# Altium PCB SH-C30G-V1.5.PcbDoc
Units mil, origin at the board's own origin, x right, y up, seen from the top; angles counter-clockwise.
Board outline 2106.3 x 1417.32 mil, 2 copper layers (Top Layer, Bottom Layer), stack 62.206 mil thick; 38 components, 29 nets, 151 pads, 53 vias.
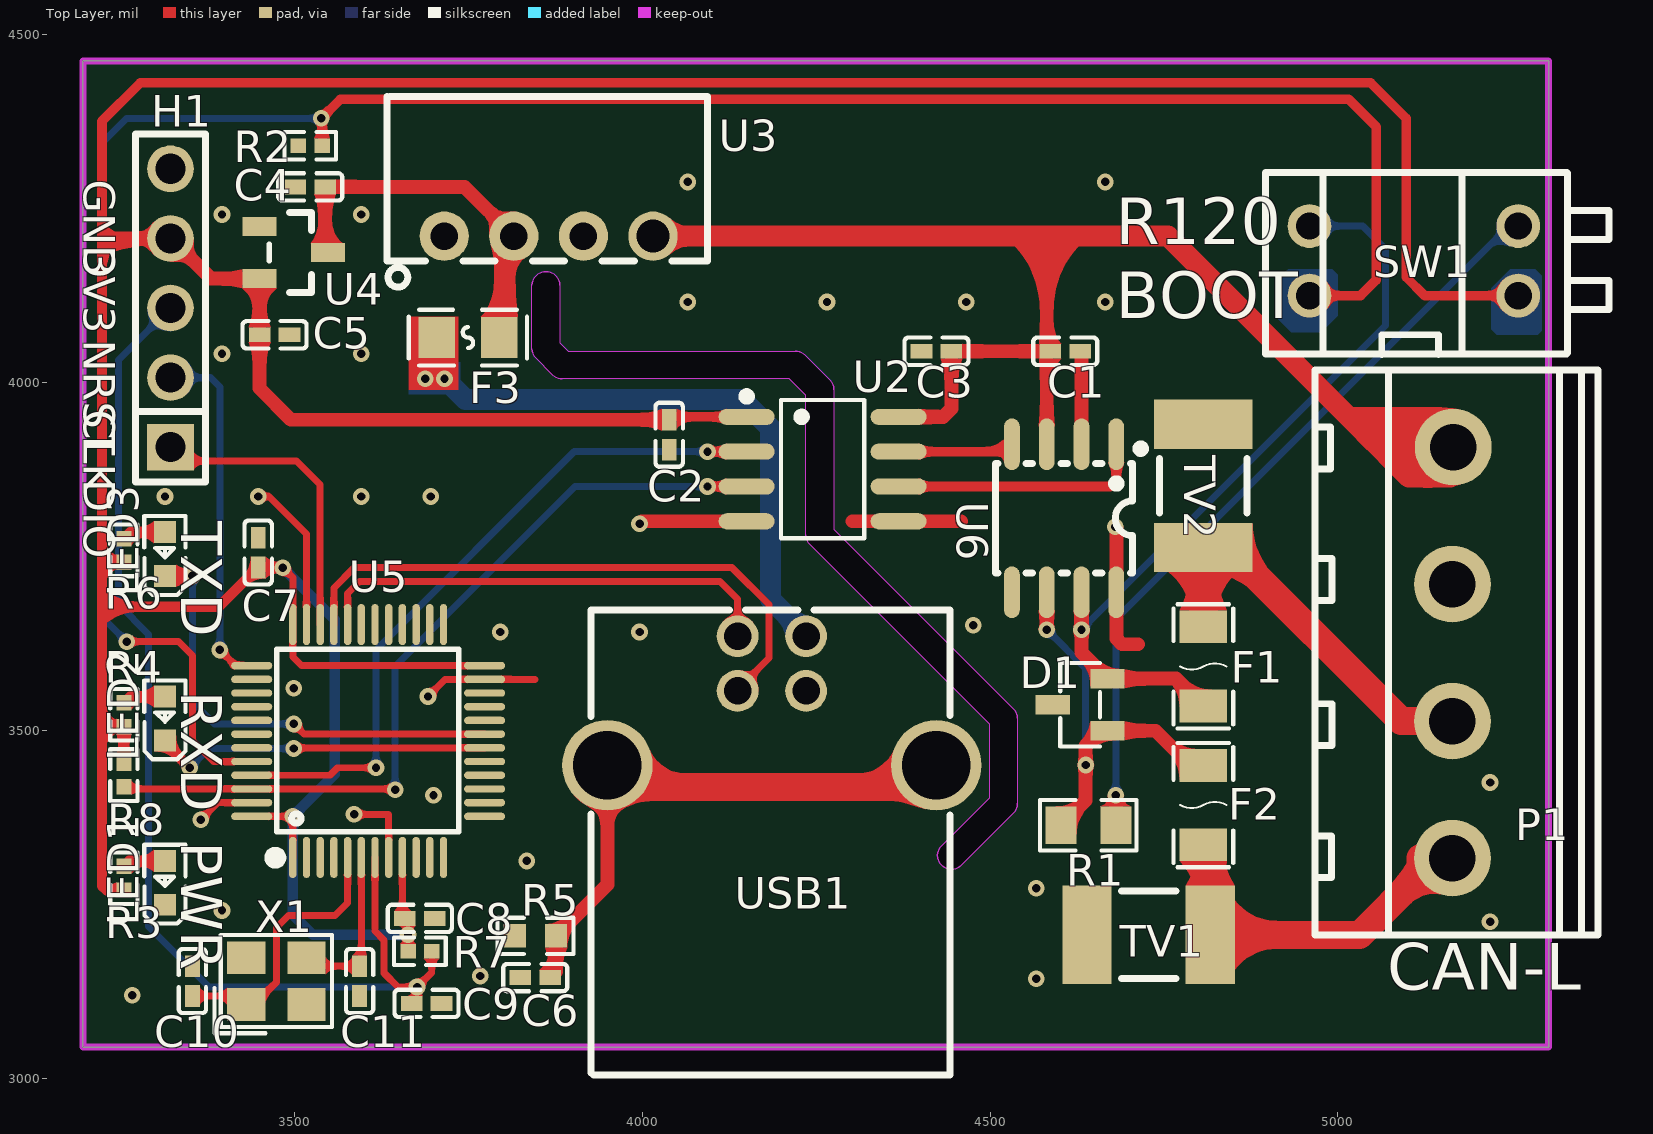
[diagram p0: Top Layer view]
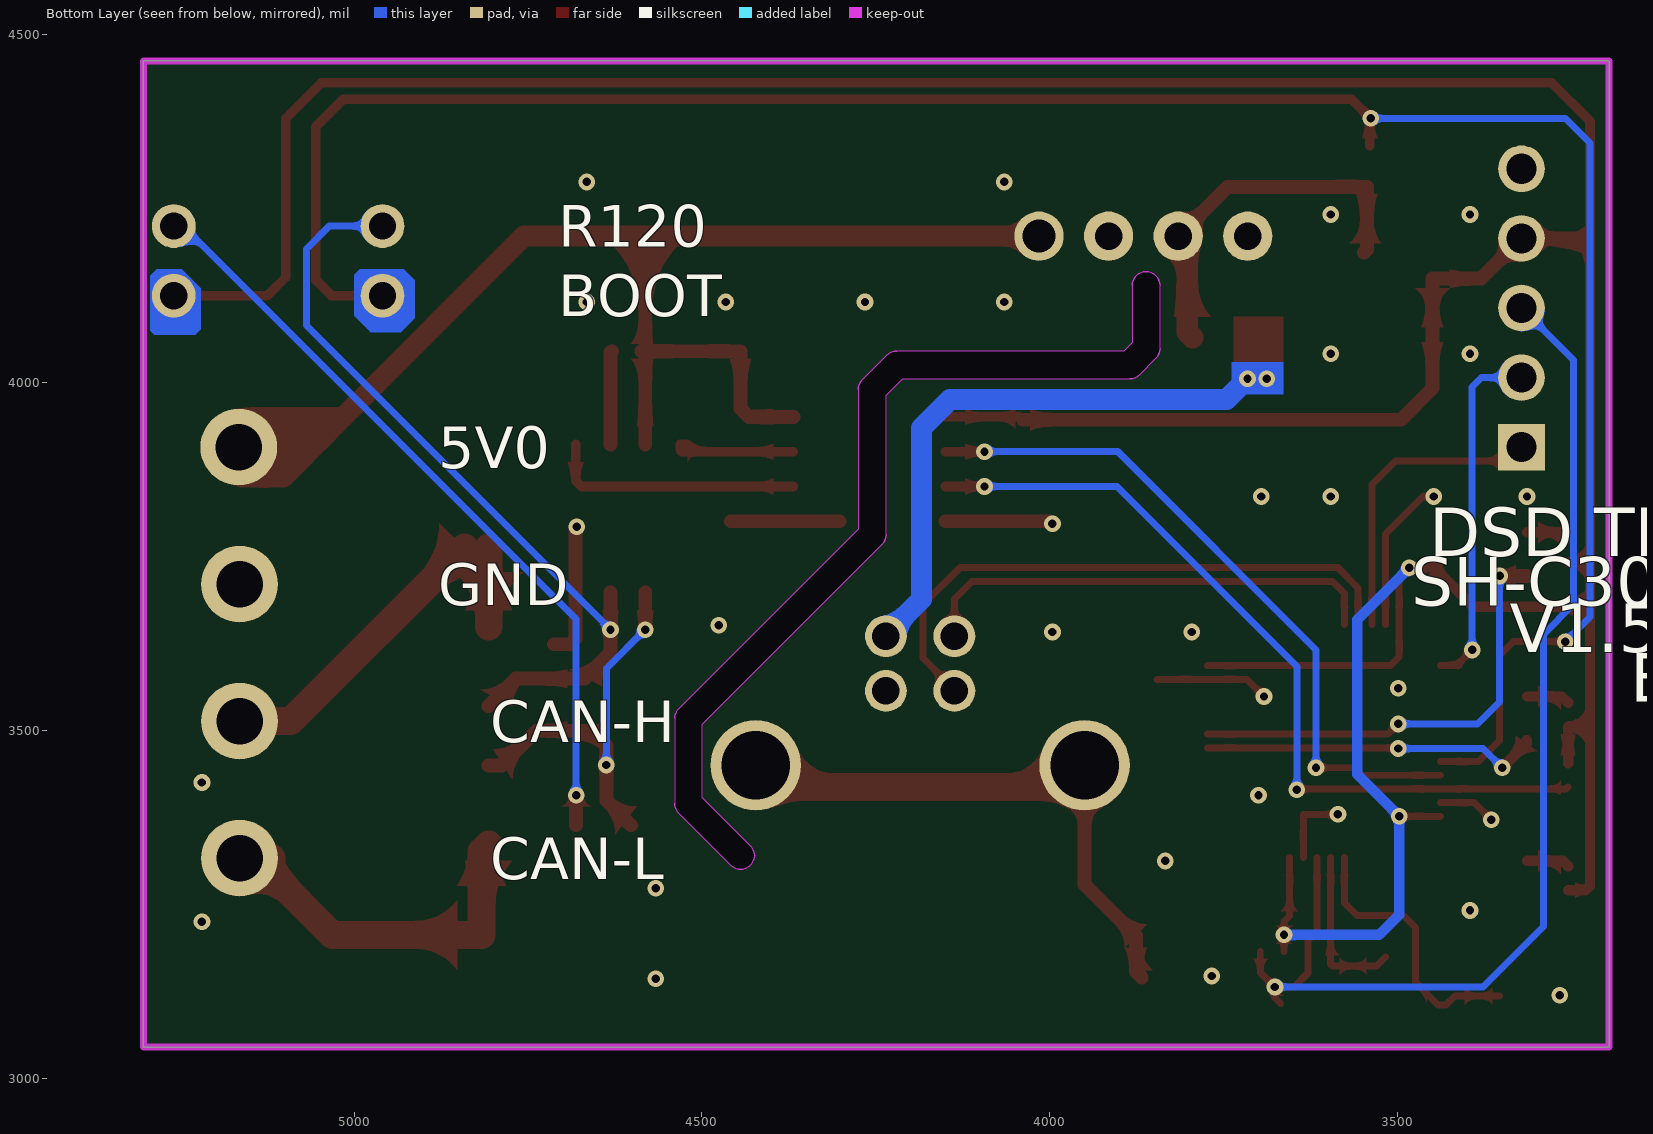
[diagram p1: Bottom Layer view, seen from below]

## Layer stack, top to bottom
Top Solder Mask Layer: solder mask 0.394, Dk 3.3
Top Layer: signal copper 1.379
Dielectric1: surface 59.449, FR4, Dk 4.5
Bottom Layer: signal copper 1.378
Bottom Solder Mask Layer: solder mask 0.394, Dk 3.3

## Board outline
3196.5,3044.65 3196.5,4461.97 5302.79,4461.97 5302.79,3044.65
cut-out: 4458.67,3306.1 4455.64,3303.61 4452.18,3301.76 4448.43,3300.62 4444.53,3300.24 4440.63,3300.62 4436.87,3301.76 4433.42,3303.61 4430.39,3306.1 4427.9,3309.13 4426.05,3312.58 4424.91,3316.34 4424.53,3320.24 4424.91,3324.14 4426.05,3327.89 4427.9,3331.35 4430.39,3334.38 4499.33,3403.33 4499.33,3508.8 4241.41,3766.73 4238.92,3769.76 4237.07,3773.21 4235.94,3776.97 4235.55,3780.87 4235.55,3981.25 4211.83,4004.96 3885.47,4004.96 3881.57,4005.35 3877.82,4006.49 3874.36,4008.33 3871.33,4010.82 3847.71,4034.44 3845.22,4037.47 3843.37,4040.93 3842.23,4044.68 3841.85,4048.58 3841.85,4139.14 3842.23,4143.04 3843.37,4146.79 3845.22,4150.25 3847.71,4153.28 3850.74,4155.77 3854.2,4157.61 3857.95,4158.75 3861.85,4159.14 3865.75,4158.75 3869.5,4157.61 3872.96,4155.77 3875.99,4153.28 3878.48,4150.25 3880.33,4146.79 3881.47,4143.04 3881.85,4139.14 3881.85,4056.87 3893.76,4044.96 4220.12,4044.96 4224.02,4044.58 4227.77,4043.44 4231.23,4041.59 4234.26,4039.1 4269.69,4003.67 4272.18,4000.64 4274.03,3997.18 4275.17,3993.43 4275.55,3989.53 4275.55,3789.15 4533.47,3531.23 4535.96,3528.2 4537.81,3524.74 4538.95,3520.99 4539.33,3517.09 4539.33,3395.04 4538.95,3391.14 4537.81,3387.39 4535.96,3383.93 4533.47,3380.9 4458.67,3306.1

## Design rules (kind name [scope] priority, off if disabled: settings)
BoardOutlineClearance Default [All] p0: genericclearance=10 ignorepadtopadclearanceinfootprint=FALSE except(0: Arc-SplitContinuation Track-SplitContinuation SMDPad-SplitContinuation THPad-SplitContinuation Via-SplitContinuation Fill-SplitContinuation Poly-SplitContinuation Region-SplitContinuation Text-SplitContinuation)
BoardOutlineClearance Plane_Default [All] p0: genericclearance=10 ignorepadtopadclearanceinfootprint=FALSE except(0: Arc-SplitContinuation Track-SplitContinuation SMDPad-SplitContinuation THPad-SplitContinuation Via-SplitContinuation Fill-SplitContinuation Poly-SplitContinuation Region-SplitContinuation Text-SplitContinuation)
BoardOutlineClearance Copper_gge5476 [All] p0: genericclearance=10 ignorepadtopadclearanceinfootprint=FALSE except(0: Arc-SplitContinuation Track-SplitContinuation SMDPad-SplitContinuation THPad-SplitContinuation Via-SplitContinuation Fill-SplitContinuation Poly-SplitContinuation Region-SplitContinuation Text-SplitContinuation)
BoardOutlineClearance Copper_gge6378 [All] p0: genericclearance=10 ignorepadtopadclearanceinfootprint=FALSE except(0: Arc-SplitContinuation Track-SplitContinuation SMDPad-SplitContinuation THPad-SplitContinuation Via-SplitContinuation Fill-SplitContinuation Poly-SplitContinuation Region-SplitContinuation Text-SplitContinuation)
BoardOutlineClearance Copper_gge5478 [All] p0: genericclearance=10 ignorepadtopadclearanceinfootprint=FALSE except(0: Arc-SplitContinuation Track-SplitContinuation SMDPad-SplitContinuation THPad-SplitContinuation Via-SplitContinuation Fill-SplitContinuation Poly-SplitContinuation Region-SplitContinuation Text-SplitContinuation)
BoardOutlineClearance Copper_gge6371 [All] p0: genericclearance=10 ignorepadtopadclearanceinfootprint=FALSE except(0: Arc-SplitContinuation Track-SplitContinuation SMDPad-SplitContinuation THPad-SplitContinuation Via-SplitContinuation Fill-SplitContinuation Poly-SplitContinuation Region-SplitContinuation Text-SplitContinuation)
BoardOutlineClearance otherClearance [All] p0: genericclearance=10 ignorepadtopadclearanceinfootprint=FALSE except(0: Arc-SplitContinuation Track-SplitContinuation SMDPad-SplitContinuation THPad-SplitContinuation Via-SplitContinuation Fill-SplitContinuation Poly-SplitContinuation Region-SplitContinuation Text-SplitContinuation)
Clearance Default [All] p1: gap=7 ignorepadtopadclearanceinfootprint=FALSE
Clearance Plane_Default [All] p1: gap=7 ignorepadtopadclearanceinfootprint=FALSE
Clearance Copper_gge5476 [All] p1: gap=7 ignorepadtopadclearanceinfootprint=FALSE
Clearance Copper_gge6378 [All] p1: gap=7 ignorepadtopadclearanceinfootprint=FALSE
Clearance Copper_gge5478 [All] p1: gap=7 ignorepadtopadclearanceinfootprint=FALSE
Clearance Copper_gge6371 [All] p1: gap=7 ignorepadtopadclearanceinfootprint=FALSE
Clearance otherClearance [All] p1: gap=7 ignorepadtopadclearanceinfootprint=FALSE
DiffPairsRouting differentialPair [All] p1: maxuncoupledlength=10 minlimit=5.9843 maxlimit=Infinity mostfreqgap=5.9843 toplayer_minwidth=5 toplayer_prefwidth=10 toplayer_maxwidth=100 bottomlayer_minwidth=5 bottomlayer_prefwidth=10 bottomlayer_maxwidth=100
PasteMaskExpansion pasteMaskExpansion [All] p1: expansion=0
PlaneConnect Default [All] p1: planeconnectstyle=Relief reliefexpansion=20 reliefentries=4 reliefconductorwidth=0 reliefairgap=10
PolygonConnect gge5476 [All] p1: connectstyle=Direct reliefentries=4 reliefconductorwidth=10 polygonreliefangle="90 Angle" airgapwidth=10
PolygonConnect gge6378 [All] p1: connectstyle=Direct reliefentries=4 reliefconductorwidth=10 polygonreliefangle="90 Angle" airgapwidth=10
PolygonConnect gge5478 [All] p1: connectstyle=Direct reliefentries=4 reliefconductorwidth=10 polygonreliefangle="90 Angle" airgapwidth=10
PolygonConnect gge6371 [All] p1: connectstyle=Direct reliefentries=4 reliefconductorwidth=10 polygonreliefangle="90 Angle" airgapwidth=10
RoutingVias Default [All] p1: viastyle="Through Hole" holewidth=12.0078 minholewidth=12.0078 maxholewidth=2362.0078 width=12.0078 minwidth=12.0078 maxwidth=2362.0078
SolderMaskExpansion solderMaskExpansion [IsVia] p1: useseparateexpansions=TRUE expansion=-1000 expansionbottom=-1000
SolderMaskExpansion solderMaskExpansion [All] p2: useseparateexpansions=TRUE expansion=4.0157 expansionbottom=4.0157
Width Default [All] p1: maxlimit=1000 minlimit=8 preferedwidth=10

## Components (designator, comment, footprint, x,y, rotation, side; value= is the part's Value field where it differs from the comment)
C1 "" C0402 4608.11,4044.65 r180 top locked
C2 "" C0402 4039.02,3924.76 r90 top locked
C3 "" C0402 4423.07,4044.65 r0 top locked
C4 "" C0402 3523.27,4280.87 r0 top locked
C5 "" C0402 3472.09,4068.27 r180 top locked
C6 "" C0402 3846.5,3144.65 r0 top locked
C7 "" C0402 3448.46,3755.47 r270 top locked
C8 "" C0402 3680.75,3229.69 r180 top locked
C9 "" C0402 3690.5,3107.64 r180 top locked
C10 "" C0402 3353.98,3139.73 r90 top locked
C11 "" C0402 3594.13,3139.73 r90 top locked
D1 "" SOT-23-3_L2.9-W1.3-P1.90-LS2.4-BR 4629.57,3536.77 r0 top locked
F1 "SMD1206B020TF/24" F1206_1 4806.5,3591.89 r90 top locked
F2 "SMD1206B020TF/24" F1206_1 4806.5,3392.6 r270 top locked
F3 "SMD0805B050TF" F0805_2 3749.9,4064.35 r0 top locked
H1 "" HDR-TH_5P-P2.54-V-M 3322.48,4106.85 r90 top locked
LED1 "" LED0603-RD_RED_1 3314.61,3280.87 r90 top locked
LED2 "" LED0603-RD 3314.61,3517.09 r90 top locked
LED3 "" LED0603-RD 3314.61,3753.31 r90 top locked
P1 "WJ128V-5.0-4P" CONN-TH_4P-P5.00_WJ128V-4P-5.0-14-00A 5165,3611.58 r90 top locked
R1 "" R0805 4641.38,3363.55 r0 top locked
R2 "" R0402 3523.27,4339.92 r0 top locked
R3 "" R0402 3255.55,3287.45 r90 top locked
R4 "" R0402 3255.55,3522.32 r90 top locked
R5 "" R0603 3846.84,3204.65 r0 top locked
R6 "" R0402 3255.55,3758.54 r90 top locked
R7 "" R0402 3680.8,3182.44 r180 top locked
R8 "NC" R0402 3255.55,3435.7 r270 top locked
SW1 "DP-02RP" SW-TH_DP-02XP 5109.05,4174.57 r90 top locked
TV1 "" DIO-DT-SMD_L4.5-W3.2 4727.99,3206.06 r180 top locked
TV2 "" DIO-DT-SMD_L4.5-W3.2 4806.5,3851.34 r90 top locked
U2 "ADUM3201ARZ" SOIC-8_L4.9-W3.9-P1.27-LS6.0-BL 4259.49,3875.36 r270 top locked
U3 "B0505S-1WR3" PWRM-TH_B0503S-1WR2 3865.79,4210 r0 top locked
U4 "ME6209A33M3G" SOT-23(SOT-23-3) 3499.65,4186.38 r270 top locked
U5 "" LQFP-48_L7.0-W7.0-P0.50-LS9.0-BL 3606.5,3484.65 r0 top locked
U6 "SIT1040T" SO-8_L4.9-W3.9-P1.27-LS5.9-BL 4606.5,3804.65 r180 top locked
USB1 "" USB-B-TH_USB-B01 4186.5,3542.6 r180 top locked
X1 "-" CRYSTAL-SMD_4P-L3.2-W2.5-BL 3474.6,3139.75 r0 top locked

## Footprints (in the part's own frame and the unit in brackets; to place one, negate y for a bottom-side part, rotate by r counter-clockwise, add the part's x,y. Pads: shape width x height; smd on the part's side, far side on the other; paste and mask are expansions set on the pad)
C0402 [mm]
  rect 0.79x0.54 smd paste-100 mask+0.051: 1(-0.545,0) 2(0.545,0)
  silkscreen extent -1.17,-0.5 1.17,0.5
CONN-TH_4P-P5.00_WJ128V-4P-5.0-14-00A [mm]
  round 2.8 hole 1.7 paste+0 mask+0.051: 1(-7.5,0.015) 2(-2.5,0.015) 3(2.5,0.015) 4(7.5,-0.015)
  silkscreen extent -10.31,-5.29 10.31,5.02
CRYSTAL-SMD_4P-L3.2-W2.5-BL [mm]
  rect 1.4x1.2 smd paste+0 mask+0.051: 1(-1.1,-0.85) 2(1.1,-0.85) 3(1.1,0.85) 4(-1.1,0.85)
  silkscreen extent -2.26,-1.91 2.03,1.68
DIO-DT-SMD_L4.5-W3.2 [mm]
  rect 1.8x3.6 smd paste+0 mask+0.051: 1(-2.25,0) 2(2.25,0)
  silkscreen extent -1,-1.6 1,1.6
F0805_2 [mm]
  rect 1.335x1.5 smd paste-100 mask+0.051: 1(-1.142,0) 2(1.142,0)
  silkscreen extent -2.16,-1.02 2.16,1.02
F1206_1 [mm]
  rect 1.19x1.728 smd paste+0 mask+0.051: 1(-1.445,0) 2(1.445,0)
  silkscreen extent -2.27,-1.09 2.27,1.09
HDR-TH_5P-P2.54-V-M [mm]
  rect 1.7x1.7 hole 1.1 paste+0 mask+0.051: 1(-5.08,0)
  round 1.7 hole 1.1 paste+0 mask+0.051: 2(-2.54,0) 3(0,0) 4(2.54,0) 5(5.08,0)
  silkscreen extent -6.35,-1.27 6.35,1.27
LED0603-RD [mm]
  rect 0.8x0.8 smd paste+0 mask+0.051: 1(-0.799,-0.003) 2(0.799,0.003)
  silkscreen extent -1.49,-0.75 1.39,0.76
LED0603-RD_RED_1 [mm]
  rect 0.8x0.8 smd paste+0 mask+0.051: 1(-0.8,-0.003) 2(0.8,0.003)
  silkscreen extent -1.49,-0.75 1.39,0.76
LQFP-48_L7.0-W7.0-P0.50-LS9.0-BL [mm]
  oval 0.27x1.5 smd paste+0 mask+0.05: 1(-2.75,-4.25) 2(-2.25,-4.25) 3(-1.75,-4.25) 4(-1.25,-4.25) 5(-0.75,-4.25) 6(-0.25,-4.25) 7(0.25,-4.25) 8(0.75,-4.25) 9(1.25,-4.25) 10(1.75,-4.25) 11(2.25,-4.25) 12(2.75,-4.25) 25(2.75,4.25) 26(2.25,4.25) 27(1.75,4.25) 28(1.25,4.25) 29(0.75,4.25) 30(0.25,4.25) 31(-0.25,4.25) 32(-0.75,4.25) 33(-1.25,4.25) 34(-1.75,4.25) 35(-2.25,4.25) 36(-2.75,4.25)
  oval 1.5x0.27 smd paste+0 mask+0.05: 13(4.25,-2.75) 14(4.25,-2.25) 15(4.25,-1.75) 16(4.25,-1.25) 17(4.25,-0.75) 18(4.25,-0.25) 19(4.25,0.25) 20(4.25,0.75) 21(4.25,1.25) 22(4.25,1.75) 23(4.25,2.25) 24(4.25,2.75) 37(-4.25,2.75) 38(-4.25,2.25) 39(-4.25,1.75) 40(-4.25,1.25) 41(-4.25,0.75) 42(-4.25,0.25) 43(-4.25,-0.25) 44(-4.25,-0.75) 45(-4.25,-1.25) 46(-4.25,-1.75) 47(-4.25,-2.25) 48(-4.25,-2.75)
  silkscreen extent -3.59,-4.46 3.3,3.34
PWRM-TH_B0503S-1WR2 [mm]
  round 1.8 hole 1 paste+0 mask+0.051: 1(-3.81,0) 2(-1.27,0) 3(1.27,0)
  round 1.8 hole 1.2 paste+0 mask+0.051: 4(3.81,0)
  silkscreen extent -5.9,-1.86 5.8,5.1
R0402 [mm]
  rect 0.566x0.54 smd paste-100 mask+0.051: 1(-0.433,0) 2(0.433,0)
  silkscreen extent -0.94,-0.5 0.94,0.5
R0603 [mil]
  rect 31.75x34.02 smd paste-3937.01 mask+2: 1(-29.66,0) 2(29.66,0)
  silkscreen extent -55,-26 55,26
R0805 [mm]
  rect 1.133x1.377 smd paste-100 mask+0.051: 1(-1,0) 2(1,0)
  silkscreen extent -1.76,-0.92 1.76,0.92
SO-8_L4.9-W3.9-P1.27-LS5.9-BL [mil]
  oval 22.6x74.33 smd paste+0 mask+2: 1(-75,-106.26) 2(-25,-106.26) 3(25,-106.26) 4(75,-106.26) 5(75,106.26) 6(25,106.26) 7(-25,106.26) 8(-75,106.26)
  silkscreen extent -116,-106 98,79
SOIC-8_L4.9-W3.9-P1.27-LS6.0-BL [mm]
  oval 0.588x2.045 smd paste+0 mask+0.051: 1(-1.905,-2.772) 2(-0.635,-2.772) 3(0.635,-2.772) 4(1.905,-2.772) 5(1.905,2.772) 6(0.635,2.772) 7(-0.635,2.772) 8(-1.905,2.772)
  silkscreen extent -2.8,-2.92 2.53,1.52
SOT-23(SOT-23-3) [mm]
  rect 0.7x1.25 smd paste+0 mask+0.102: 1(-0.95,-1.25) 2(0.95,-1.25) 3(0,1.25)
  silkscreen extent -1.46,-0.9 1.46,0.65
SOT-23-3_L2.9-W1.3-P1.90-LS2.4-BR [mm]
  rect 1.25x0.7 smd paste+0 mask+0.051: 1(1,-0.95) 2(1,0.95) 3(-1,0)
  silkscreen extent -0.73,-1.53 0.73,1.53
SW-TH_DP-02XP [mm]
  round 1.6 hole 1 paste+0 mask+0.051: 1(-1.27,-3.81) 2(1.27,-3.81) 3(1.27,3.81) 4(-1.27,3.81)
  silkscreen extent -3.42,-7.13 3.22,5.42
USB-B-TH_USB-B01 [mil]
  round 60 hole 39.4 paste+0 mask+2: 1(-49.2,-92.7) 2(49.2,-92.7) 3(49.2,-14) 4(-49.2,-14)
  round 129.9 hole 98.4 paste+0 mask+2: 5(-236.2,92.7) 6(236.2,92.7)
  silkscreen extent -256,-130 260,538

## Via types
v1: diameter 24, hole 12, Top Layer to Bottom Layer, 53 vias

## Nets (pads, with @x,y where several pads share a name; then routed paths per layer and width w, separated by ;. In a path a pad name is that pad's centre, name@x,y a point inside that pad or via, vN(x,y) a via of type N, cw(c..) or ccw(c..) an arc to the next point about the centre after c; other vN are vias at no path point)
$3N14841: F3.1 USB1.1 | length 843.6
  Bottom Layer w30: v1(3688.62,4005.28) v1(3716.18,4005.28) 3746.18,3975.28 4143.82,3975.28 4184.69,3934.41 4184.69,3688.36 USB1.1@4235.7,3637.35
$3N14842: LED1.2 R3.2 | length 62.2
  Top Layer w15: R3.2 3263.41,3312.34 LED1.2
$3N14843: LED2.2 R4.2 | length 62.7
  Top Layer w15: R4.2 3264.76,3548.56 LED2.2
$3N14844: LED3.2 R6.2 | length 62.7
  Top Layer w15: R6.2 3264.76,3784.78 LED3.2
$3N18645: C6.2 R5.2 USB1.5 USB1.6 | length 882.7
  Top Layer w19.68: C6.2 3876.5,3153.19 R5.2 3950.3,3278.45 USB1.6@3950.3,3442.03
  Top Layer w40: USB1.6@3950.3,3489.27 3950.3,3442.03 3973.66,3418.66 4403.27,3418.66 4422.7,3438.09 USB1.5@4422.7,3451.95
$3N22964: C11.2 U5.6 X1.3 | length 238.8
  Top Layer w10: X1.3@3517.92,3174.18 3530.91,3161.19 C11.2 3596.66,3163.71 U5.6
$3N23449: C10.1 U5.5 X1.1 | length 400.7
  Top Layer w10: C10.1 3418.31,3118.27 3431.3,3105.28 3442.17,3105.28 3474.6,3137.72 3474.6,3216.46 3491.77,3233.62 3558.7,3233.62 3576.97,3251.89 U5.5
$3N29005: R1.2 SW1.2 | length 1108.6
  Top Layer w20: R1.2 v1(4680.75,3406.85)
  Bottom Layer w10: v1(4680.75,3406.85) 4680.75,3659.9 5245.42,4224.57 SW1.2
$3N54755: F2.2 P1.1 TV1.1 | length 494.8
  Top Layer w40: F2.2 4816.57,3325.63 TV1.1 5031.14,3206.06 5118.46,3293.39 P1.1@5118.46,3316.3
$3N54765: F1.2 P1.2 TV2.1 | length 494.5
  Top Layer w40: F1.2 TV2.1 ; TV2.1@4841.29,3762.76 5090.91,3513.15 P1.2@5118.46,3513.15
+3V3: C2.2 C5.2 C7.2 C8.2 H1.4 R3.1 R4.1 R6.1 R7.2 R8.1 SW1.1 U2.1 U4.2 U5.1 U5.9 U5.24 U5.36 U5.48 | length 6432.8
  Top Layer w10: 3224.05,4223.09 3225.49,4223.09 3241.73,4206.85 ; U5.48 v1(3498.23,3376.38) U5.1 ; v1(3483.9,3733.62) 3498.23,3719.3 U5.36 3498.23,3605.12 3510.43,3592.92 U5.24 ; U5.9 3655.71,3233.27 C8.2 3663.76,3225.22 v1(3663.76,3206.07) R7.2
  Top Layer w13.78: 3227.2,4206.85 3224.05,4210 3224.05,4223.09 3224.05,4375.36 3279.17,4430.47 5046.89,4430.47 5098.07,4379.29 5098.07,4150.95 5124.45,4124.57 SW1.1 ; C2.2 4043.15,3950.36 U2.1
  Top Layer w15: 3227.2,4206.85 3224.05,4206.85 3224.05,4189.17 ; 3241.73,4206.85 3224.05,4189.17 ; R3.1 3230.58,3270.41 3224.05,3276.93 3224.05,3505.49 ; R8.1 R4.1 3224.26,3505.28 3224.05,3505.49 ; R6.1 3224.93,3741.5 3224.05,3742.38 ; v1(3483.9,3733.62) 3483.51,3734.01 C7.2 3392,3677.55 3224.05,3677.55 ; 3224.05,3505.49 3224.05,3677.55 ; 3224.05,3677.55 3224.05,3742.38 ; 3224.05,3742.38 3224.05,4189.17
  Top Layer w20: 3227.2,4206.85 3241.73,4206.85 H1.4 3380.35,4148.98 U4.2 3450.44,3991.49 3495.71,3946.22 C2.2
  Bottom Layer w15: v1(3483.9,3733.62) 3558.7,3658.82 3558.7,3436.85 v1(3498.23,3376.38) 3498.23,3235.04 3527.2,3206.07 v1(3663.76,3206.07)
+5V: C4.2 F3.2 U3.2 U4.3 | length 550.9
  Top Layer w20: U4.3 3544.73,4190.5 C4.2 3744.92,4280.87 U3.2
  Top Layer w31.5: F3.2 3802.8,4072.21 3802.8,4197.01 U3.2
BOOT0: R2.2 SW1.4 U5.44 | length 3292.1
  Top Layer w10: v1(3259.49,3627.32) 3334.29,3627.32 3353.98,3607.64 3353.98,3485.59 3384.45,3455.12 U5.44
  Top Layer w13.78: R2.2 3540.31,4378 v1(3539.02,4379.29) 3566.4,4406.67 5015.57,4406.67 5054.76,4367.48 5054.76,4147.01 5032.32,4124.57 SW1.4
  Bottom Layer w10: v1(3259.49,3627.32) 3224.05,3662.76 3224.05,4343.86 3259.49,4379.29 v1(3539.02,4379.29)
CAN_RXD: U2.7 U6.4 | length 196.8
  Top Layer w13.78: U2.7 4510.87,3900.36 ; 4510.87,3900.36 4521.42,3910.91 U6.4 4531.5,3903.03 4528.82,3900.36 4510.87,3900.36
CAN_TXD: U2.6 U6.1 | length 368.4
  Top Layer w13.8: U2.6 4672.87,3850.36 4681.5,3858.98 U6.1
GND: C2.1 C4.1 C5.1 C6.1 C7.1 C8.1 C9.1 C10.2 C11.1 H1.5 LED1.1 R2.1 R5.1 U2.4 U3.1 U4.1 U5.8 U5.23 U5.35 U5.47 USB1.4 X1.2 X1.4 | length 736.5
  Top Layer w10: v1(3365.79,3371.42) 3390.44,3396.07 U5.47 ; v1(3448.46,3835.99) 3464.21,3835.99 3517.92,3782.28 U5.35 ; v1(3586.26,3379.29) 3636.03,3379.29 U5.8 ; v1(3692.56,3548.58) 3717.2,3573.23 U5.23 3846.1,3573.23
  Top Layer w20: v1(3996.5,3796.62) 4000.24,3800.36 U2.4
  other v1: 3267.36,3119.45 3767.36,3147.01 3396.5,3241.24 3834.29,3312.36 3700.43,3406.85 3499.65,3560.4 3796.5,3641.24 3996.5,3641.24 3314.61,3835.99 3596.5,3835.99 3696.5,3835.99 3396.5,4041.24 3596.5,4041.24 3396.5,4241.24 3596.5,4241.24
GND-CAN: C1.1 C3.1 D1.3 P1.3 TV1.2 TV2.2 U2.5 U3.3 U6.2 U6.8 | length 486.2
  Top Layer w20: 4302.5,3800.36 U2.5 4458.5,3800.36 ; C1.1 4631.5,4042.72 U6.2 ; v1(4679.91,3792.32) 4681.5,3790.74 U6.8 4681.5,3631.65 4689.5,3623.65 4712.5,3623.65
  other v1: 4566.58,3143.07 5218.54,3224.96 4566.58,3272.99 5218.54,3424.96 4476.02,3650.95 4065.8,4115.51 4265.8,4115.51 4465.8,4115.51 4665.8,4115.51 4065.79,4287.95 4665.79,4287.95
JL-SWCLK: H1.2 U5.37 | length 509.6
  Top Layer w10: v1(3393.35,3615.51) 3415.94,3592.92 U5.37
  Bottom Layer w10: H1.2 3379.96,4006.85 3393.35,3993.47 v1(3393.35,3615.51)
JL-SWDIO: H1.1 U5.34 | length 438.5
  Top Layer w10: H1.1 3342.17,3887.17 3503.58,3887.17 3537.6,3853.15 U5.34
LED1: LED2.1 U5.18 | length 489.6
  Top Layer w10: v1(3499.65,3473.78) 3500.67,3474.81 U5.18
  Top Layer w15: LED2.1 3314.74,3481.52 v1(3350.04,3446.22)
  Bottom Layer w10: v1(3350.04,3446.22) 3377.6,3473.78 v1(3499.65,3473.78)
LED2: LED3.1 U5.19 | length 659.3
  Top Layer w10: v1(3499.65,3509.21) 3514.37,3494.49 U5.19
  Top Layer w19.68: LED3.1 v1(3353.98,3721.83)
  Bottom Layer w10: v1(3353.98,3721.83) 3353.98,3540.71 3385.47,3509.21 v1(3499.65,3509.21)
NRST: C9.2 H1.3 R7.1 U5.7 | length 1673.6
  Top Layer w10: U5.7 3616.34,3211.42 3629.57,3198.19 3629.57,3150.95 3649.25,3131.26 v1(3676.81,3131.26) ; C9.2 3676.81,3115.41 v1(3676.81,3131.26) ; R7.1 3697.84,3152.29 v1(3676.81,3131.26)
  Bottom Layer w10: H1.3 3247.68,4032.05 3247.68,3681.26 3290.98,3637.95 3290.98,3217.88 3377.6,3131.26 v1(3676.81,3131.26)
RXD: U2.2 U5.45 | length 1002.9
  Top Layer w10: U5.45 3551.85,3435.44 3562.64,3446.22 v1(3617.76,3446.22)
  Top Layer w13.78: v1(4094.13,3900.36) U2.2
  Bottom Layer w10: v1(3617.76,3446.22) 3617.76,3615.51 3902.6,3900.36 v1(4094.13,3900.36)
TXD: R8.2 U2.3 U5.46 | length 1180.6
  Top Layer w10: R8.2 3258.47,3415.75 U5.46 3644.29,3415.75 v1(3645.31,3414.73)
  Top Layer w13.78: v1(4094.13,3850.36) U2.3
  Bottom Layer w10: v1(3645.31,3414.73) 3645.31,3591.89 3903.78,3850.36 v1(4094.13,3850.36)
UCAN_H: D1.2 F1.1 SW1.3 U6.7 | length 1144.6
  Top Layer w20: U6.7 v1(4631.5,3644.65) 4631.5,3611.62 D1.2 4767.32,3574.17 F1.1
  Bottom Layer w10: v1(4631.5,3644.65) 5068.5,4081.65 5068.5,4191.65 5035.57,4224.57 SW1.3
UCAN_L: D1.1 F2.1 R1.1 U6.6 | length 598.9
  Top Layer w20: v1(4581.5,3644.65) U6.6 ; R1.1 4637.44,3398.98 v1(4637.44,3450.16) 4637.44,3477.72 4659.1,3499.37 D1.1 4737.83,3499.37 4787.72,3449.49 F2.1
  Bottom Layer w10: v1(4581.5,3644.65) 4637.44,3588.7 v1(4637.44,3450.16)
USBDM: U5.32 USB1.2 | length 674
  Top Layer w10: U5.32 3576.97,3696.77 3594.13,3713.94 4111.89,3713.94 4137.3,3688.53 USB1.2@4137.3,3637.35
USBDP: U5.33 USB1.3 | length 852.4
  Top Layer w10: U5.33 3557.29,3704.65 3586.26,3733.62 4129.57,3733.62 4182.3,3680.9 4182.3,3603.65 USB1.3@4137.3,3558.65
VDD-CAN: C1.2 C3.2 P1.4 U2.8 U3.4 U6.3 | length 2555.5
  Top Layer w20: U2.8 4432.72,3950.36 4444.53,3962.17 C3.2 C1.2@4581.5,4044.65 ; 4578.51,4210 4581.5,4207.02 4581.5,4049.8 C1.2 C1.2@4581.5,4044.65 ; U6.3 C1.2@4581.5,4044.65
  Top Layer w30: U3.4 4578.51,4210 4755.55,4210 5016.16,3949.39 ; 5016.16,3949.39 P1.4@5146.08,3949.39 ; 5016.16,3949.39 5027.21,3938.35 ; 5027.21,3938.35 5088.15,3938.35 ; 5027.21,3938.35 5046.89,3918.66 ; 5046.89,3918.66 5058.7,3906.85 ; 5046.89,3918.66 5105.98,3918.66 5106.91,3919.59 ; 5058.7,3906.85 P1.4@5119.64,3906.85 ; 5058.7,3906.85 5078.39,3887.17 ; 5078.39,3887.17 5102.01,3863.55 5161.06,3863.55 5172.87,3875.36 5172.87,3922.6 P1.4@5146.08,3949.39 ; 5078.39,3887.17 5145.91,3887.17 P1.4 P1.4@5119.64,3906.85 ; 5088.15,3938.35 5106.91,3919.59 ; 5088.15,3938.35 P1.4@5146.08,3949.39 ; 5106.91,3919.59 P1.4@5119.64,3906.85
pads on no net: U5.2 U5.3 U5.4 U5.10 U5.11 U5.12 U5.13 U5.14 U5.15 U5.16 U5.17 U5.20 U5.21 U5.22 U5.25 U5.26 U5.27 U5.28 U5.29 U5.30 U5.31 U5.38 U5.39 U5.40 U5.41 U5.42 U5.43 U6.5

## Polygon pours and split planes (outlines as drawn)
GND-CAN on Top Layer (solid, remove dead copper, pour order 2): 3905.16,4355.67 3877.6,4328.11 3877.6,4036.77 3869.72,4028.9 4259.49,4028.9 4259.49,3796.62 4515.39,3540.71 4515.39,3430.47 4440.59,3355.67 4440.59,3060.4 4456.34,3044.65 5284.71,3044.65 5306.73,3066.67 5306.73,3958.03 5267.36,3997.4 4976.02,3997.4 4889.41,4084.02 4889.41,4304.49 4838.23,4355.67
GND-CAN on Bottom Layer (solid, remove dead copper, pour order 8): 3901.22,4355.67 3873.66,4328.11 3873.66,4036.77 3865.79,4028.9 4255.55,4028.9 4255.55,3796.62 4511.46,3540.71 4511.46,3430.47 4459.4,3378.42 4459.4,3044.65 5280.77,3044.65 5302.79,3066.67 5302.79,3961.97 5267.36,3997.4 4842.17,3997.4 4822.48,4017.09 4822.48,4335.99 4802.8,4355.67
GND-CAN on Top Layer (solid, remove dead copper, pour order 0): 3877.83,4273.77 3877.83,4051.89 3963.72,4051.89 3963.72,4273.77
GND on Bottom Layer (solid, remove dead copper, pour order 10): 3196.5,4461.97 3519.33,4461.97 3539.02,4461.97 3802.8,4461.97 3804.33,4221.46 3804.33,4113.72 3794.94,4104.33 3665.63,4104.33 3649.25,4087.95 3649.25,3950.36 4173.86,3950.36 4188.62,3935.59 4188.62,3800.3 4326.42,3662.51 4326.42,3481.66 4294.66,3449.9 3950.3,3449.9 3950.3,3041.24 3946.89,3044.65 3196.5,3044.65
GND on Top Layer (solid, remove dead copper, pour order 6): 3644.83,4273.77 3644.83,4108.89 3763.72,4108.89 3763.72,4273.77
GND on Top Layer (solid, remove dead copper, pour order 4): 3196.5,4461.97 3519.33,4461.97 3527.2,4454.1 3527.2,4298.39 3544.73,4280.87 3744.92,4280.87 3804.33,4221.46 3804.33,4113.72 3794.94,4104.33 3665.63,4104.33 3657.13,4095.83 3657.13,3946.3 3657.04,3946.22 4169.72,3946.22 4173.86,3950.36 4188.62,3935.59 4188.62,3800.3 4326.42,3662.51 4326.42,3481.66 4294.66,3449.9 3950.3,3449.9 3950.3,3041.24 3946.89,3044.65 3196.5,3044.65

## Keep-outs
Board Outline Layer:
  region: 4458.67,3306.1 4455.64,3303.61 4452.18,3301.76 4448.43,3300.62 4444.53,3300.24 4440.63,3300.62 4436.87,3301.76 4433.42,3303.61 4430.39,3306.1 4427.9,3309.13 4426.05,3312.58 4424.91,3316.34 4424.53,3320.24 4424.91,3324.14 4426.05,3327.89 4427.9,3331.35 4430.39,3334.38 4499.33,3403.33 4499.33,3508.8 4241.41,3766.73 4238.92,3769.76 4237.07,3773.21 4235.94,3776.97 4235.55,3780.87 4235.55,3981.25 4211.83,4004.96 3885.47,4004.96 3881.57,4005.35 3877.82,4006.49 3874.36,4008.33 3871.33,4010.82 3847.71,4034.44 3845.22,4037.47 3843.37,4040.93 3842.23,4044.68 3841.85,4048.58 3841.85,4139.14 3842.23,4143.04 3843.37,4146.79 3845.22,4150.25 3847.71,4153.28 3850.74,4155.77 3854.2,4157.61 3857.95,4158.75 3861.85,4159.14 3865.75,4158.75 3869.5,4157.61 3872.96,4155.77 3875.99,4153.28 3878.48,4150.25 3880.33,4146.79 3881.47,4143.04 3881.85,4139.14 3881.85,4056.87 3893.76,4044.96 4220.12,4044.96 4224.02,4044.58 4227.77,4043.44 4231.23,4041.59 4234.26,4039.1 4269.69,4003.67 4272.18,4000.64 4274.03,3997.18 4275.17,3993.43 4275.55,3989.53 4275.55,3789.15 4533.47,3531.23 4535.96,3528.2 4537.81,3524.74 4538.95,3520.99 4539.33,3517.09 4539.33,3395.04 4538.95,3391.14 4537.81,3387.39 4535.96,3383.93 4533.47,3380.9 4458.67,3306.1
  region: 4458.67,3306.1 4455.64,3303.61 4452.18,3301.76 4448.43,3300.62 4444.53,3300.24 4440.63,3300.62 4436.87,3301.76 4433.42,3303.61 4430.39,3306.1 4427.9,3309.13 4426.05,3312.58 4424.91,3316.34 4424.53,3320.24 4424.91,3324.14 4426.05,3327.89 4427.9,3331.35 4430.39,3334.38 4499.33,3403.33 4499.33,3508.8 4241.41,3766.73 4238.92,3769.76 4237.07,3773.21 4235.94,3776.97 4235.55,3780.87 4235.55,3981.25 4211.83,4004.96 3885.47,4004.96 3881.57,4005.35 3877.82,4006.49 3874.36,4008.33 3871.33,4010.82 3847.71,4034.44 3845.22,4037.47 3843.37,4040.93 3842.23,4044.68 3841.85,4048.58 3841.85,4139.14 3842.23,4143.04 3843.37,4146.79 3845.22,4150.25 3847.71,4153.28 3850.74,4155.77 3854.2,4157.61 3857.95,4158.75 3861.85,4159.14 3865.75,4158.75 3869.5,4157.61 3872.96,4155.77 3875.99,4153.28 3878.48,4150.25 3880.33,4146.79 3881.47,4143.04 3881.85,4139.14 3881.85,4056.87 3893.76,4044.96 4220.12,4044.96 4224.02,4044.58 4227.77,4043.44 4231.23,4041.59 4234.26,4039.1 4269.69,4003.67 4272.18,4000.64 4274.03,3997.18 4275.17,3993.43 4275.55,3989.53 4275.55,3789.15 4533.47,3531.23 4535.96,3528.2 4537.81,3524.74 4538.95,3520.99 4539.33,3517.09 4539.33,3395.04 4538.95,3391.14 4537.81,3387.39 4535.96,3383.93 4533.47,3380.9 4458.67,3306.1
  lines w0.1: 4241.41,3766.73 4499.33,3508.8 4499.33,3403.33 4430.39,3334.38 ccw(c4444.53,3320.24) 4424.53,3320.24 ccw(c4444.53,3320.24) 4444.53,3300.24 ccw(c4444.53,3320.24) 4458.67,3306.1 4533.47,3380.9 ccw(c4519.33,3395.04) 4539.33,3395.04 4539.33,3517.09 ccw(c4519.33,3517.09) 4533.47,3531.23 ; 4241.41,3766.73 4241.41,3766.73 ; 4241.41,3766.73 cw(c4255.55,3780.87) 4235.55,3780.87 4235.55,3981.25 4211.83,4004.96 3885.47,4004.96 cw(c3885.47,4024.96) 3871.33,4010.82 3847.71,4034.44 cw(c3861.85,4048.58) 3841.85,4048.58 3841.85,4139.14 cw(c3861.85,4139.14) 3861.85,4159.14 cw(c3861.85,4139.14) 3881.85,4139.14 3881.85,4056.87 3893.76,4044.96 4220.12,4044.96 cw(c4220.12,4024.96) 4234.26,4039.1 4269.69,4003.67 cw(c4255.55,3989.53) 4275.55,3989.53 4275.55,3789.15 4533.47,3531.23 ; 4533.47,3531.23 4533.47,3531.23
  lines w10: 3196.5,3044.65 3196.5,4461.97 5302.79,4461.97 5302.79,3044.65 3196.5,3044.65

## Other copper
Top Layer:
  drawing of 154 lines, arcs and shapes, not listed
Bottom Layer:
  region net +3V3: 5247.68,4162.76 5283.11,4162.76 5292.99,4152.88 5292.99,4074.21 5287.05,4068.27 5227.99,4068.27 5220.12,4076.14 5220.12,4135.2
  region net BOOT0: 4991.77,4162.76 4999.65,4154.88 4999.65,4095.83 4976.02,4072.21 4932.72,4072.21 4913.03,4091.89 4913.03,4147.01 4928.78,4162.76
  region net $3N14841: 3665,4028.9 3665,3982.88 3738.58,3982.88 3738.58,4028.9
  region net JL-SWCLK: 3368.21,4011.85 3368.21,4001.85 3365.61,4001.74 3363.37,4001.4 3361.45,4000.87 3359.81,4000.14 3358.4,3999.24 3357.17,3998.17 3356.08,3996.96 3355.07,3995.62 3353.16,3992.6 3351.05,3989.23 3348.38,3985.63 3346.73,3983.78 3344.79,3981.91 3344.79,4031.8 3346.73,4029.93 3348.38,4028.08 3351.05,4024.47 3353.16,4021.1 3355.07,4018.08 3356.08,4016.74 3357.17,4015.53 3358.4,4014.47 3359.81,4013.57 3361.45,4012.84 3363.37,4012.3 3365.61,4011.97
  region net NRST: 3293.68,4070.98 3286.61,4078.05 3288.37,4079.97 3289.71,4081.79 3290.69,4083.53 3291.33,4085.2 3291.7,4086.84 3291.81,4088.46 3291.73,4090.09 3291.49,4091.75 3290.71,4095.24 3289.82,4099.11 3289.16,4103.54 3289.02,4106.03 3289.07,4108.71 3324.34,4073.44 3321.65,4073.39 3319.17,4073.53 3314.74,4074.19 3310.87,4075.08 3307.38,4075.86 3305.72,4076.1 3304.09,4076.18 3302.47,4076.07 3300.83,4075.71 3299.15,4075.06 3297.42,4074.09 3295.6,4072.74
  region net $3N14841: 4196.37,3655.45 4219.11,3675.14 4220.98,3673.46 4223.19,3671.8 4225.65,3670.2 4228.28,3668.72 4231,3667.42 4233.72,3666.35 4236.35,3665.57 4238.81,3665.14 4205.7,3635.08 4205.47,3637.64 4204.87,3640.37 4203.94,3643.18 4202.75,3645.98 4201.34,3648.7 4199.77,3651.24 4198.1,3653.52
  region net UCAN_H: 5002.1,4229.57 5002.1,4219.57 4999.68,4219.46 4997.6,4219.15 4995.8,4218.66 4994.26,4217.98 4992.93,4217.14 4991.76,4216.16 4990.71,4215.04 4989.75,4213.79 4985.91,4207.88 4983.4,4204.54 4981.85,4202.82 4980.05,4201.09 4980.05,4248.04 4981.85,4246.31 4983.4,4244.6 4985.91,4241.26 4989.75,4235.34 4990.71,4234.1 4991.76,4232.98 4992.93,4231.99 4994.26,4231.16 4995.8,4230.48 4997.6,4229.98 4999.68,4229.67
  region net $3N29005: 5220.97,4193.05 5224.06,4210.28 5225.1,4211.49 5225.94,4212.81 5226.59,4214.23 5227.09,4215.73 5227.71,4218.94 5227.99,4222.34 5228.33,4229.31 5228.77,4232.69 5229.15,4234.31 5229.65,4235.87 5251.09,4194.1 5242.71,4196.39 5238.72,4197.31 5234.87,4197.86 5233,4197.94 5231.16,4197.87 5229.36,4197.63 5227.61,4197.19 5225.89,4196.53 5224.21,4195.63 5222.57,4194.48
  region net UCAN_H: 4639.56,3659.78 4646.63,3652.71 4645.9,3651.85 4645.28,3650.88 4644.33,3648.67 4643.74,3646.3 4643.48,3643.98 4630.83,3656.63 4633.14,3656.9 4635.52,3657.48 4637.73,3658.43 4638.7,3659.05
  region net UCAN_L: 4632.44,3466.56 4642.44,3466.56 4642.53,3465.44 4642.78,3464.31 4643.67,3462.08 4644.94,3459.99 4646.39,3458.16 4628.5,3458.16 4629.95,3459.99 4631.21,3462.08 4632.1,3464.31 4632.35,3465.44
  region net UCAN_L: 4596.63,3636.59 4589.56,3629.52 4588.7,3630.24 4587.73,3630.87 4585.52,3631.81 4583.14,3632.4 4580.83,3632.67 4593.48,3645.31 4593.74,3643 4594.33,3640.63 4595.28,3638.42 4595.9,3637.44
  region net $3N29005: 4675.75,3423.25 4685.75,3423.25 4685.84,3422.13 4686.09,3421 4686.98,3418.77 4688.24,3416.68 4689.69,3414.85 4671.8,3414.85 4673.25,3416.68 4674.52,3418.77 4675.41,3421 4675.66,3422.13
  region net BOOT0: 3522.62,4374.29 3522.62,4384.29 3523.74,4384.38 3524.87,4384.63 3527.1,4385.53 3529.19,4386.79 3531.02,4388.24 3531.02,4370.35 3529.19,4371.8 3527.1,4373.06 3524.87,4373.95 3523.74,4374.2
  region net RXD: 4077.73,3895.36 4077.73,3905.36 4078.85,3905.44 4079.98,3905.7 4082.22,3906.59 4084.31,3907.85 4086.13,3909.3 4086.13,3891.41 4084.31,3892.86 4082.22,3894.12 4079.98,3895.02 4078.85,3895.27
  region net TXD: 4077.73,3845.36 4077.73,3855.36 4078.85,3855.44 4079.98,3855.7 4082.22,3856.59 4084.31,3857.85 4086.13,3859.3 4086.13,3841.41 4084.31,3842.86 4082.22,3844.12 4079.98,3845.02 4078.85,3845.27
  region net LED2: 3358.98,3705.43 3348.98,3705.43 3348.89,3706.55 3348.64,3707.68 3347.74,3709.92 3346.48,3712.01 3345.03,3713.83 3362.92,3713.83 3361.47,3712.01 3360.21,3709.92 3359.32,3707.68 3359.06,3706.55
  region net LED1: 3358.1,3461.35 3365.17,3454.28 3364.44,3453.43 3363.82,3452.45 3362.87,3450.24 3362.29,3447.87 3362.02,3445.55 3349.37,3458.2 3351.69,3458.47 3354.06,3459.06 3356.27,3460 3357.25,3460.63
  region net JL-SWCLK: 3388.35,3631.91 3398.35,3631.91 3398.43,3630.79 3398.69,3629.66 3399.58,3627.43 3400.84,3625.34 3402.29,3623.51 3384.4,3623.51 3385.85,3625.34 3387.11,3627.43 3388.01,3629.66 3388.26,3630.79
  region net NRST: 3660.41,3126.26 3660.41,3136.26 3661.53,3136.35 3662.66,3136.6 3664.89,3137.49 3666.98,3138.76 3668.81,3140.21 3668.81,3122.32 3666.98,3123.77 3664.89,3125.03 3662.66,3125.92 3661.53,3126.17
  region net +3V3: 3647.36,3198.57 3647.36,3213.57 3649.74,3213.48 3651.88,3213.44 3652.88,3213.56 3653.85,3213.83 3654.81,3214.3 3655.76,3215.01 3655.76,3197.12 3654.81,3197.84 3653.85,3198.3 3652.88,3198.57 3651.88,3198.69 3649.74,3198.66
  region net +3V3: 3505.73,3359.98 3490.73,3359.98 3490.82,3362.37 3490.85,3364.5 3490.73,3365.5 3490.46,3366.47 3489.99,3367.43 3489.28,3368.38 3507.17,3368.38 3506.46,3367.43 3505.99,3366.47 3505.72,3365.5 3505.6,3364.5 3505.63,3362.37
  region net +3V3: 3504.52,3393.28 3515.13,3382.67 3513.37,3381.05 3511.84,3379.56 3511.21,3378.77 3510.72,3377.89 3510.37,3376.88 3510.21,3375.71 3497.56,3388.36 3498.73,3388.53 3499.74,3388.87 3500.62,3389.37 3501.41,3389.99 3502.9,3391.52
  region net +3V3: 3500.8,3727.33 3490.19,3716.72 3488.57,3718.48 3487.08,3720.01 3486.29,3720.64 3485.41,3721.13 3484.4,3721.48 3483.23,3721.64 3495.88,3734.29 3496.05,3733.12 3496.39,3732.11 3496.89,3731.23 3497.51,3730.44 3499.04,3728.95
  region net BOOT0: 3244.36,3635.39 3251.43,3642.46 3252.28,3641.73 3253.26,3641.11 3255.47,3640.16 3257.84,3639.57 3260.16,3639.31 3247.51,3626.66 3247.24,3628.97 3246.65,3631.34 3245.71,3633.55 3245.09,3634.53
  region net RXD: 3612.76,3462.62 3622.76,3462.62 3622.84,3461.5 3623.09,3460.37 3623.99,3458.14 3625.25,3456.05 3626.7,3454.22 3608.81,3454.22 3610.26,3456.05 3611.52,3458.14 3612.42,3460.37 3612.67,3461.5
  region net TXD: 3640.31,3431.13 3650.31,3431.13 3650.4,3430.01 3650.65,3428.88 3651.55,3426.64 3652.81,3424.55 3654.26,3422.73 3636.37,3422.73 3637.82,3424.55 3639.08,3426.64 3639.98,3428.88 3640.23,3430.01
  region net LED2: 3483.25,3504.21 3483.25,3514.21 3484.37,3514.3 3485.5,3514.55 3487.73,3515.45 3489.82,3516.71 3491.65,3518.16 3491.65,3500.27 3489.82,3501.72 3487.73,3502.98 3485.5,3503.88 3484.37,3504.13
  region net LED1: 3483.25,3468.78 3483.25,3478.78 3484.37,3478.87 3485.5,3479.12 3487.73,3480.01 3489.82,3481.28 3491.65,3482.73 3491.65,3464.84 3489.82,3466.29 3487.73,3467.55 3485.5,3468.44 3484.37,3468.69

## Silkscreen, mask and mechanical layers (free items; w line width, h text height)
Top Silkscreen Layer:
  text "GND" at 3197.75,4290.9 h45 r270
  text "R120" at 4680.75,4198.19 h66.36
  text "3V3" at 3197.75,4190.9 h45 r270
  text "BOOT" at 4680.75,4091.89 h66.36
  text "NRST" at 3197.75,4061.27 h45 r270
  text "CLK" at 3197.75,3960.9 h45 r270
  text "DIO" at 3197.75,3860.9 h45 r270
  text "TXD" at 3338.23,3800.55 h58.98 r270
  text "RXD" at 3338.23,3556.46 h58.98 r270
  text "PWR" at 3338.23,3339.92 h58.98 r270
  text "CAN-L" at 5070.51,3127.32 h66.36
Bottom Silkscreen Layer:
  text "R120" at 4706.5,4194.61 h60
  text "BOOT" at 4706.5,4094.61 h60
  text "5V0" at 4879,3876.9 h60
  text "DSD TECH" at 3455,3749.81 h70
  text "GND" at 4879,3680.05 h60
  text "SH-C30G" at 3481.25,3678.94 h70
  text "V1.5-20241005" at 3339.5,3612.01 h70
  text "Base on Canable 1.0" at 3166.25,3541.14 h70
  text "CAN-H" at 4804,3483.2 h60
  text "CAN-L" at 4804,3286.35 h60
Mechanical Layer:
  lines w0.1: 4241.41,3766.73 4499.33,3508.8 4499.33,3403.33 4430.39,3334.38 ccw(c4444.53,3320.24) 4424.53,3320.24 ccw(c4444.53,3320.24) 4444.53,3300.24 ccw(c4444.53,3320.24) 4458.67,3306.1 4533.47,3380.9 ccw(c4519.33,3395.04) 4539.33,3395.04 4539.33,3517.09 ccw(c4519.33,3517.09) 4533.47,3531.23 ; 4241.41,3766.73 4241.41,3766.73 ; 4241.41,3766.73 cw(c4255.55,3780.87) 4235.55,3780.87 4235.55,3981.25 4211.83,4004.96 3885.47,4004.96 cw(c3885.47,4024.96) 3871.33,4010.82 3847.71,4034.44 cw(c3861.85,4048.58) 3841.85,4048.58 3841.85,4139.14 cw(c3861.85,4139.14) 3861.85,4159.14 cw(c3861.85,4139.14) 3881.85,4139.14 3881.85,4056.87 3893.76,4044.96 4220.12,4044.96 cw(c4220.12,4024.96) 4234.26,4039.1 4269.69,4003.67 cw(c4255.55,3989.53) 4275.55,3989.53 4275.55,3789.15 4533.47,3531.23 ; 4533.47,3531.23 4533.47,3531.23